# Altium PCB usbasp.PcbDoc (part 1 of 3)
Units mm, origin at the board's own origin, x right, y up, seen from the top; angles counter-clockwise.
Board outline 86.49 x 53.59 mm, 2 copper layers (Top Layer, Bottom Layer); 22 components, 22 nets, 89 pads, 22 vias.
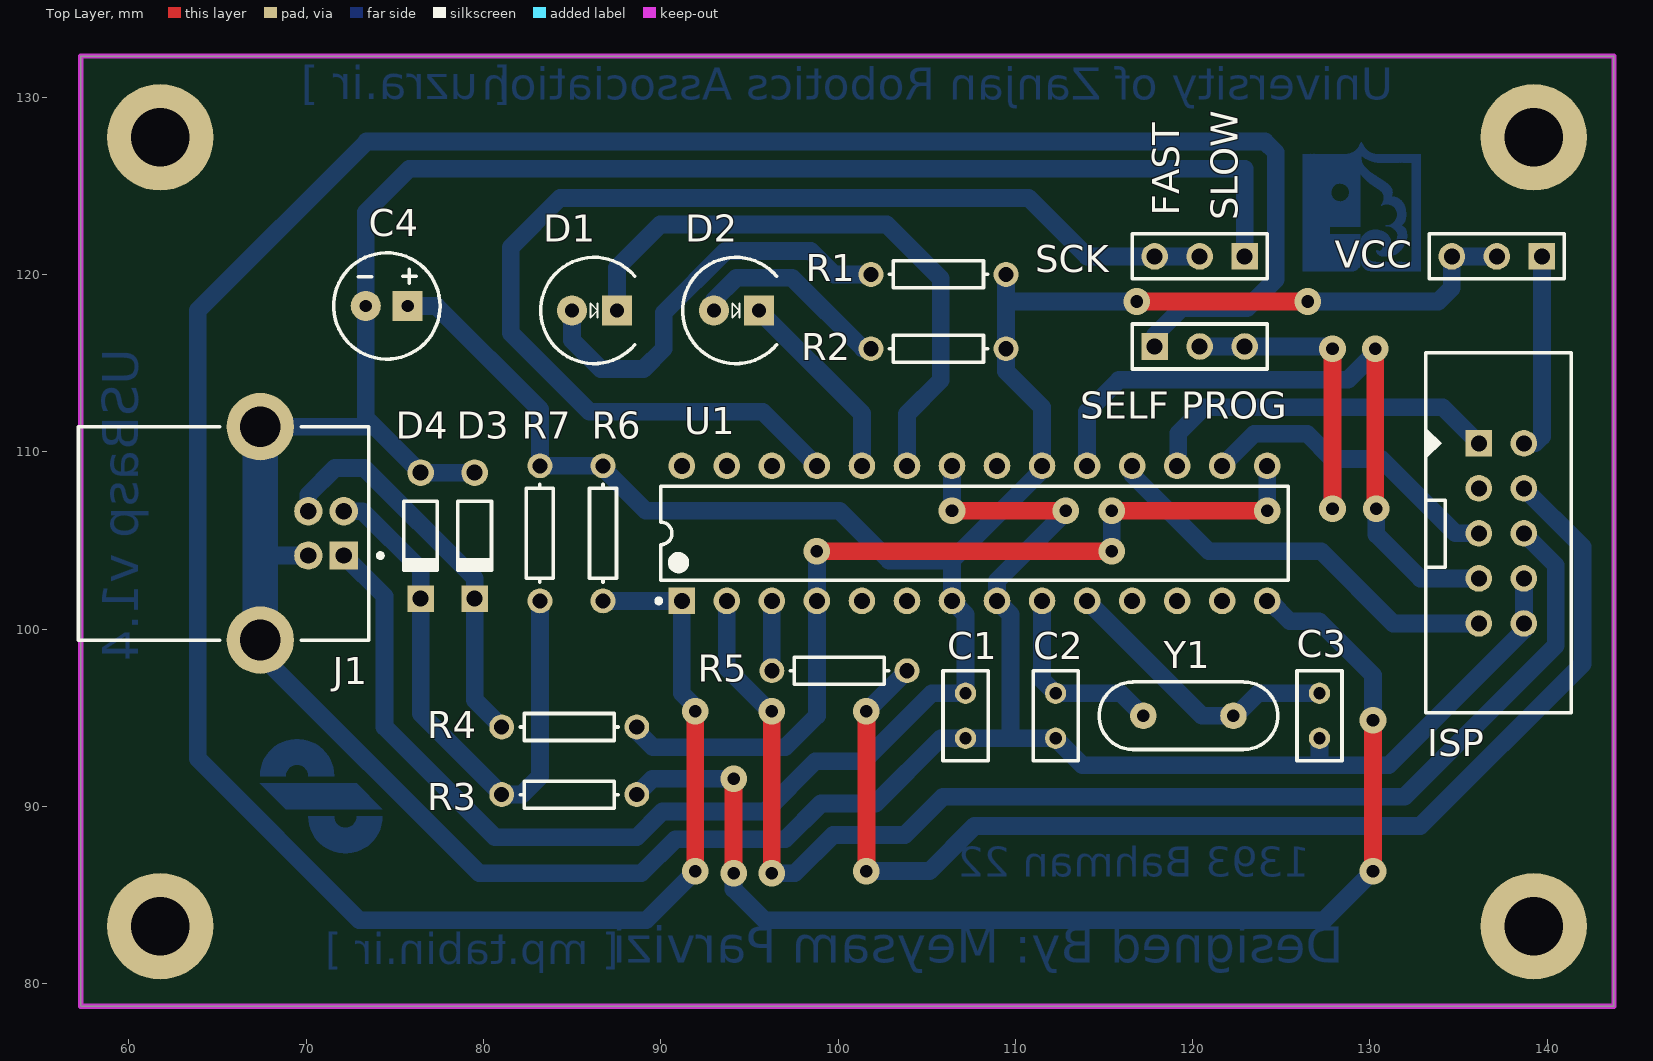
[diagram p0: Top Layer view]
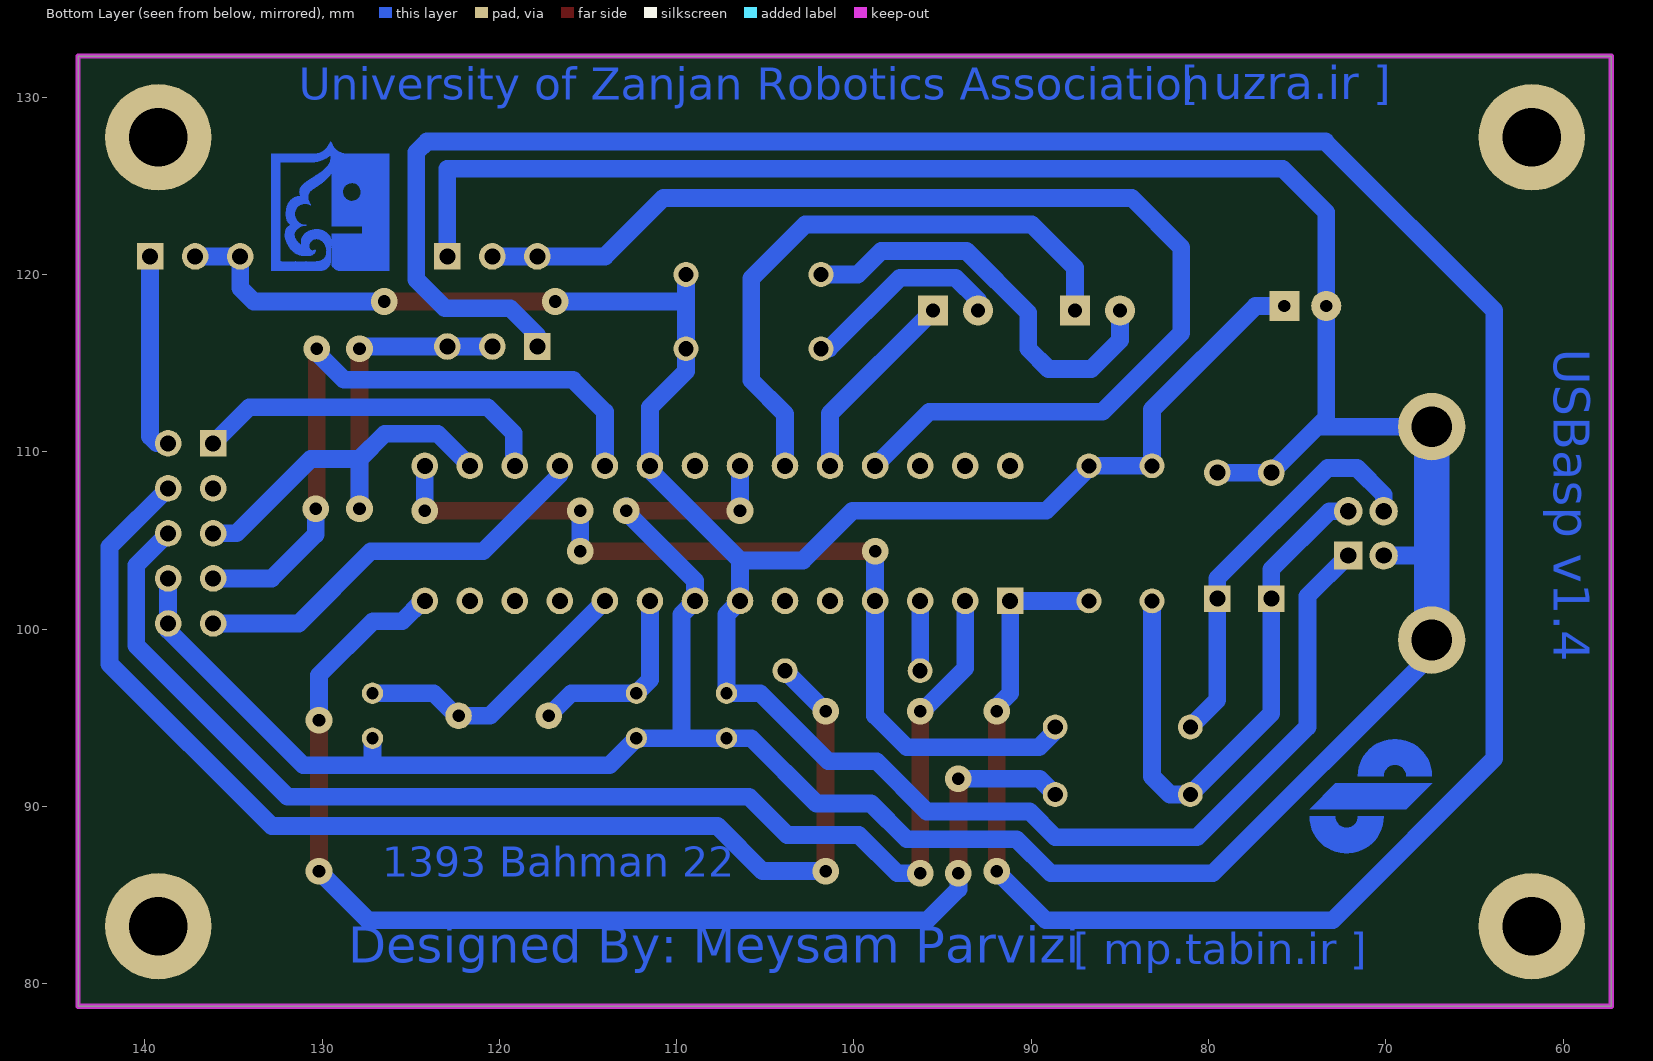
[diagram p1: Bottom Layer view, seen from below]

## Layer stack, top to bottom
Top Solder: solder mask 0.0102, Solder Resist, Dk 3.5
Top Layer: signal copper 0.0356
Dielectric1: dielectric 0.32, FR-4, Dk 4.8
Bottom Layer: signal copper 0.0356
Bottom Solder: solder mask 0.0102, Solder Resist, Dk 3.5

## Board outline
57.277,78.74 143.764,78.74 143.764,132.334 57.277,132.334

## Design rules (kind name [scope] priority, off if disabled: settings)
Clearance [All] p1: gap=0.5
FabricationTestPointUsage TestPointUsage [All] p1: valid=0 allowmultiple=FALSE
FabricationTestpoint Testpoint [All] p1: side=3 testpointundercomponent=TRUE minsize=1.016 maxsize=2.54 preferedsize=1.524 minholesize=0 maxholesize=1.016 preferedholesize=0.813 testpointgrid=0.025 allowsidetop=TRUE allowsidebottom=TRUE usegrid=TRUE gridtolerance=0
PolygonConnect [All] p1: connectstyle=Relief reliefconductorwidth=0.254 reliefentries=4 polygonreliefangle="90 Angle" airgapwidth=0.254
RoutingVias [All] p1: holewidth=0.7 width=1.5 viastyle="Through Hole" minholewidth=0.711 minwidth=1.27 maxholewidth=0.711 maxwidth=1.27
SilkToSolderMaskClearance SilkscreenOverComponentPads [IsPad] p1: minsilkscreentomaskgap=0.254 clearancetoexposedcopper=TRUE
SolderMaskExpansion [All] p1: expansion=0.102
Width [All] p1: maxlimit=2 minlimit=1 preferedwidth=1.5
27 further rules are at their usual default settings.

## Components (designator, comment, footprint, x,y, rotation, side; value= is the part's Value field where it differs from the comment)
C1 "Cap" RAD-0.1 107.188,95.123 r90 top
C2 "Cap" RAD-0.1 112.268,95.123 r270 top
C3 "Cap" RAD-0.1 127.155,95.123 r270 top
C4 "Cap Pol1" CAP1 74.549,118.237 r0 top
D1 "LED-RED" LED1 86.233,117.983 r0 top
D2 "LED-GREEN" LED1 94.234,117.983 r0 top
D3 "3.6v" DO-35 79.502,105.283 r270 top
D4 "3.6v" DO-35 76.454,105.283 r270 top
ISP "ISP" BOX2X5 136.144,110.49 r270 top (schematic designator P1)
J1 "440119-1" 440119 71.12,105.41 r180 top
R1 "Res1" AXIAL-0.3 105.664,120.015 r0 top
R2 "Res1" AXIAL-0.3 105.664,115.824 r0 top
R3 "Res1" AXIAL-0.3 84.836,90.678 r0 top
R4 "Res1" AXIAL-0.3 84.836,94.488 r0 top
R5 "Res1" AXIAL-0.3 100.076,97.663 r180 top
R6 "Res1" AXIAL-0.3 86.741,105.41 r90 top
R7 "Res1" AXIAL-0.3 83.185,105.41 r90 top
SCK "Slow SCK" HDR1X3 122.936,121.031 r180 top (schematic designator P3)
"SELF PROG" "Self Programming" HDR1X3 117.856,115.951 r0 top (schematic designator P4)
U1 "ATmega48A-PU" 28P3 107.696,105.41 r90 top
VCC "Supply Target" HDR1X3 139.7,121.031 r180 top (schematic designator P2)
Y1 "XTAL" XTAL 119.761,95.123 r180 top

## Footprints (in the part's own frame and the unit in brackets; to place one, negate y for a bottom-side part, rotate by r counter-clockwise, add the part's x,y. Pads: shape width x height; smd on the part's side, far side on the other; paste and mask are expansions set on the pad)
28P3 [mm] "28-Pin Plastic Dual In-Line Package (PDIP)"
  rect 1.5x1.5 hole 0.9: 1(-3.81,16.51)
  round 1.5 hole 0.9: 2(-3.81,13.97) 3(-3.81,11.43) 4(-3.81,8.89) 5(-3.81,6.35) 6(-3.81,3.81) 7(-3.81,1.27) 8(-3.81,-1.27) 9(-3.81,-3.81) 10(-3.81,-6.35) 11(-3.81,-8.89) 12(-3.81,-11.43) 13(-3.81,-13.97) 14(-3.81,-16.51) 15(3.81,-16.51) 16(3.81,-13.97) 17(3.81,-11.43) 18(3.81,-8.89) 19(3.81,-6.35) 20(3.81,-3.81) 21(3.81,-1.27) 22(3.81,1.27) 23(3.81,3.81) 24(3.81,6.35) 25(3.81,8.89) 26(3.81,11.43) 27(3.81,13.97) 28(3.81,16.51)
  silkscreen extent -3.93,-17.7 2.65,17.93, body extent -3.6,-17.65 3.6,17.65, height 4.58
440119 [mm] "Connector; USB1.1, Type B, Thru-Hole; 4 Position; Right Angle"
  rect 1.6x1.6 hole 0.92: 1(-1,1.25)
  round 1.6 hole 0.92: 2(-1,-1.25) 3(1,-1.25) 4(1,1.25)
  round 3.8 hole 2.3: 5(3.71,6.02) 6(3.71,-6.02)
  silkscreen extent -3.18,-6.02 13.99,6.02
AXIAL-0.3 [mm] "Axial Device, Thru-Hole; 2 Leads; 0.3 in Pin Spacing"
  round 1.4 hole 0.85: 1(-3.81,0) 2(3.81,0)
  silkscreen extent -2.77,-0.76 2.77,0.76
BOX2X5 [mm] "Box Header; 5x2 Position"
  rect 1.5x1.5 hole 0.9: 1(0,0)
  round 1.5 hole 0.9: 2(0,2.54) 3(2.54,0) 4(2.54,2.54) 5(5.08,0) 6(5.08,2.54) 7(7.62,0) 8(7.62,2.54) 9(10.16,0) 10(10.16,2.54)
  silkscreen extent -5.1,-3 15.2,5.2, body extent -5.1,-3 15.2,5.2, height 9
CAP1 [mm] "5mm Electrolyte Capacitor; 2 Leads"
  rect 1.7x1.7 hole 0.7: 1(1.173,0)
  round 1.7 hole 0.7: 2(-1.189,0)
  silkscreen extent -3,-3 3,3
DO-35 [mm] "Diode, Axial; Body 3.8 x 1.9 mm (LxDia. max), Lead Dia. 0.53 mm (max)"
  round 1.5 hole 0.9: 1(-3.55,0)
  rect 1.5x1.5 hole 0.9: 2(3.55,0)
  silkscreen extent -1.95,-0.95 2.05,0.95
HDR1X3 [mm] "Connector; Header; 3 Position"
  rect 1.5x1.5 hole 0.9: 1(0,0)
  round 1.5 hole 0.9: 2(2.54,0) 3(5.08,0)
  silkscreen extent -1.27,-1.27 6.35,1.27
LED1 [mm] "5mm Typical RED GaAs LED; 2 Leads"
  round 1.7 hole 0.8: 1(-1.24,0)
  rect 1.7x1.7 hole 0.8: 2(1.3,0)
  silkscreen extent -3,-3 2.3,3, body extent -2.97,-3 3,2.99, height 9.1
RAD-0.1 [mm] "Radial Cap, Thru-Hole; 2 Leads; 0.1 in Pin Spacing"
  round 1.2 hole 0.7: 1(-1.27,0) 2(1.27,0)
  silkscreen extent -2.54,-1.27 2.54,1.27
XTAL [mm] "Crystal, Thru Hole, 2 Leads"
  round 1.5 hole 0.7: 1(-2.54,0) 2(2.54,0)
  silkscreen extent -5.04,-1.91 5.04,1.91

## Part data
C1 C2 C3: "Capacitor"
C4: "Polarized Capacitor (Radial)"
D1 D2: library part LED, "Typical RED GaAs LED"
D3 D4: library part "D Zener", "Zener Diode"
ISP: library part "Box 5X2", "Box, 5-Pin, Dual row"
J1: "USB 1.1, Right Angle, Thru-Hole, B Type, Receptacle, 4 Position, Beige"
R1 R2 R3 R4 R5 R6 R7: "Resistor"
SCK "SELF PROG" VCC: library part "Header 3", "Header, 3-Pin"
U1: "8-bit AVR Microcontroller, 4KB Flash, 256 Bytes EEPROM, 512 Bytes SRAM, 28-pin PDIP, Industrial Grade (-40°C to 85°C)"
Y1: "Crystal Oscillator"

## Free pads (board coordinates)
  round 6 hole 3.3: 0(61.762,83.254) 0(61.762,127.746) 0(139.238,83.254) 0(139.238,127.746)

## Via types
v1: diameter 1.5, hole 0.711, Top Layer to Bottom Layer, tented top, 17 vias
v2: diameter 1.5, hole 0.711, Top Layer to Bottom Layer, 5 vias

## Nets (pads, with @x,y where several pads share a name; then routed paths per layer and width w, separated by ;. In a path a pad name is that pad's centre, name@x,y a point inside that pad or via, vN(x,y) a via of type N, cw(c..) or ccw(c..) an arc to the next point about the centre after c; other vN are vias at no path point)
GND: C1.1 C2.2 C3.2 C4.2 D3.1 D4.1 ISP.8 ISP.10 J1.4 J1.5 J1.6 SCK.1 U1.8 U1.22 | length 208.5
  Top Layer w1: v1(106.426,106.68) v1(112.84,106.68)
  Bottom Layer w1: J1.5@67.41,99.39 67.41,98.579 79.756,86.233 88.9,86.233 90.829,88.162 97.028,88.162 99.036,90.17 102.108,90.17 105.791,93.853 C1.1@107.188,93.853 109.728,93.853 ; J1.6@67.41,111.43 73.857,111.43 ; 67.517,104.16 J1.4@70.12,104.16 ; J1.4@70.104,103.954 J1.4@70.31,104.16 ; D3.1@79.502,108.833 D4.1@76.454,108.833 73.857,111.43 ; v1(106.426,106.68) U1.22@106.426,109.22 ; v1@112.84,106.934 112.84,106.617 108.966,102.743 U1.8@108.966,101.6 109.728,100.838 109.728,93.853 ; SCK.1@122.936,121.031 122.936,125.984 75.819,125.984 73.36,123.525 C4.2@73.36,118.237 73.36,111.927 73.857,111.43 ; 127.155,92.357 C3.2@127.155,93.853 ; ISP.8@138.684,102.87 ISP.10@138.684,100.33 138.684,99.949 131.064,92.329 113.792,92.329 C2.2@112.268,93.853 109.728,93.853
  Bottom Layer w2: J1.5@67.41,99.39 J1.6@67.41,111.43
ISP_VCC: ISP.2 VCC.1 | length 11.3
  Bottom Layer w1: ISP.2@138.684,110.49 139.319,110.49 139.7,110.871 VCC.1@139.7,121.031
MISO: ISP.9 U1.18 | length 23.5
  Bottom Layer w1: U1.18@116.586,109.22 116.586,108.712 120.904,104.394 127.254,104.394 131.318,100.33 ISP.9@136.144,100.33
MOSI: ISP.1 U1.17 | length 20.2
  Bottom Layer w1: U1.17@119.191,109.22 119.191,111.063 120.65,112.522 134.112,112.522 ISP.1@136.144,110.49
NetC2_1: C2.1 U1.9 Y1.2 | length 11
  Bottom Layer w1: U1.9@111.506,101.6 111.506,97.155 C2.1@112.268,96.393 115.951,96.393 Y1.2@117.221,95.123
NetC3_1: C3.1 U1.10 Y1.1 | length 16.3
  Bottom Layer w1: U1.10@114.046,101.6 120.523,95.123 122.428,95.123 123.698,96.393 C3.1@127.155,96.393
NetD1_1: D1.1 R1.1 | length 23.7
  Bottom Layer w1: D1.1@84.993,117.983 84.993,116.302 86.614,114.681 89.027,114.681 90.17,115.824 90.17,117.855 93.648,121.333 98.466,121.333 99.784,120.015 R1.1@101.854,120.015
NetD1_2: D1.2 U1.23 | length 34.3
  Bottom Layer w1: D1.2@87.533,117.983 87.533,120.39 89.976,122.833 102.743,122.833 105.791,119.785 105.791,114.046 103.886,112.141 U1.23@103.886,109.22
NetD2_1: D2.1 R2.1 | length 11.6
  Bottom Layer w1: D2.1@92.994,117.983 92.994,118.557 94.27,119.833 97.403,119.833 101.412,115.824 R2.1@101.854,115.824
NetD2_2: D2.2 U1.24 | length 11.2
  Bottom Layer w1: D2.2@95.534,117.983 101.346,112.171 U1.24@101.346,109.22
NetD3_2: D3.2 J1.3 R4.1 | length 22.5
  Bottom Layer w1: J1.3@70.12,106.66 70.12,107.587 71.626,109.093 73.279,109.093 79.502,102.87 D3.2@79.502,101.733 79.502,96.012 R4.1@81.026,94.488
NetD4_2: D4.2 J1.2 R3.1 R7.1 | length 32.8
  Bottom Layer w1: J1.2@72.12,106.66 73.172,106.66 76.454,103.378 D4.2@76.454,101.733 76.454,95.25 R3.1@81.026,90.678 82.169,90.678 83.185,91.694 R7.1@83.185,101.6
NetP1_4: ISP.4 R5.1 | length 68.7
  Top Layer w1: v1(101.6,86.36) v1(101.6,95.377)
  Bottom Layer w1: v1(101.6,86.36) 105.156,86.36 107.696,88.9 132.842,88.9 141.986,98.044 141.986,104.648 ISP.4@138.684,107.95 ; v1(101.6,95.377) R5.1@103.886,97.663
NetP3_2: SCK.2 SCK.3 U1.25 | length 66.6
  Bottom Layer w1: U1.25@98.806,109.22 95.758,112.268 85.979,112.268 81.534,116.713 81.534,121.539 84.328,124.333 110.744,124.333 114.046,121.031 SCK.3@117.856,121.031 SCK.2@120.396,121.031
NetR3_2: R3.2 U1.14 | length 68.5
  Top Layer w1: v1(94.107,86.233) v1(94.107,91.567) ; v1(130.175,86.36) v1(130.175,94.869)
  Bottom Layer w1: R3.2@88.646,90.678 89.535,91.567 v1@93.853,91.567 ; v1(94.107,86.233) 94.107,85.344 95.859,83.592 127.407,83.592 v1(130.175,86.36) ; U1.14@124.206,101.6 124.333,101.6 125.476,100.457 127.127,100.457 130.178,97.406 v1@130.178,94.869
NetR4_2: R4.2 U1.4 U1.15 | length 51
  Top Layer w1: v1@98.933,104.394 v1(115.443,104.394) ; v1(115.443,106.68) v1(124.206,106.68)
  Bottom Layer w1: R4.2@88.646,94.488 88.646,94.262 89.563,93.345 97.028,93.345 98.806,95.123 U1.4@98.806,101.6 v1@98.806,104.521 ; v1(115.443,104.394) v1(115.443,106.68) ; v1(124.206,106.68) U1.15@124.206,109.22
  other v1: 98.806,104.394
RESET: "SELF PROG.1" R6.1 U1.1 | length 159.3
  Top Layer w1: v1(91.948,86.36) v1(91.948,95.377)
  Bottom Layer w1: R6.1@86.741,101.6 U1.1@91.186,101.6 91.186,96.393 91.948,95.631 v1(91.948,95.377) ; v1(91.948,86.36) 89.18,83.592 72.999,83.592 63.881,92.71 63.881,117.983 73.406,127.508 124.079,127.508 124.686,126.901 124.686,119.733 123.063,118.11 119.38,118.11 117.856,116.586 117.856,115.824
RX: ISP.6 U1.2 | length 73
  Top Layer w1: v1(96.266,86.233) v1(96.266,95.377)
  Bottom Layer w1: U1.2@93.726,101.6 93.726,97.799 v1@96.148,95.377 ; v1(96.266,86.233) 97.563,86.233 99.722,88.392 103.759,88.392 105.918,90.551 131.953,90.551 140.486,99.084 140.486,103.608 ISP.6@138.684,105.41
SCK: ISP.7 U1.19 | length 38.2
  Top Layer w1: v2(130.302,115.824) 130.302,106.862 v1(130.357,106.807)
  Bottom Layer w1: U1.19@114.046,109.22 114.046,112.268 115.852,114.074 128.767,114.074 130.302,115.609 v2(130.302,115.824) ; v1(130.357,106.807) 130.357,105.352 132.839,102.87 ISP.7@136.144,102.87
SS: "SELF PROG.2" "SELF PROG.3" ISP.5 U1.16 | length 36.7
  Top Layer w1: v2(127.889,106.807) v2(127.889,115.824)
  Bottom Layer w1: 120.396,115.951 122.936,115.951 v2@127.762,115.951 ; U1.16@121.666,109.22 123.468,111.022 126.468,111.022 127.889,109.601 ; v2(127.889,106.807) 127.889,109.601 ; ISP.5@136.144,105.41 134.829,105.41 130.638,109.601 127.889,109.601
TX: R5.2 U1.3 | length 3.9
  Bottom Layer w1: R5.2@96.266,97.663 U1.3@96.266,101.6
VCC: C1.2 C4.1 J1.1 R1.2 R2.2 R6.2 R7.2 U1.7 U1.20 VCC.2 VCC.3 | length 144.9
  Top Layer w1: v2(116.84,118.491) v2@126.365,118.491
  Bottom Layer w1: J1.1@72.12,104.16 74.422,101.858 74.422,94.488 80.645,88.265 88.637,88.265 90.091,89.719 95.885,89.719 98.719,92.553 101.443,92.553 105.283,96.393 C1.2@107.188,96.393 107.188,100.838 U1.7@106.426,101.6 106.426,103.886 ; C4.1@75.722,118.11 C4.1@75.849,118.237 ; C4.1@75.722,118.237 C4.1@75.849,118.237 ; R1.2@109.474,120.015 109.474,118.491 ; v2(116.84,118.491) 109.474,118.491 ; v2(126.492,118.491) v2@126.746,118.491 ; v2@126.492,118.745 v2@126.746,118.491 ; VCC.2@137.16,121.031 VCC.3@134.62,121.031 134.62,119.253 133.858,118.491 v2@126.746,118.491 ; C4.1@75.849,118.237 77.343,118.237 83.185,112.395 R7.2@83.185,109.22 86.614,109.22 89.154,106.68 100.076,106.68 102.87,103.886 106.426,103.886 ; 106.426,103.886 111.506,108.966 U1.20@111.506,109.22 111.506,112.522 109.474,114.554 R2.2@109.474,115.824 109.474,118.491
pads on no net: ISP.3 U1.5 U1.6 U1.11 U1.12 U1.13 U1.21 U1.26 U1.27 U1.28
copper on no net: | length 2972.9